# Altium PCB vcu.PcbDoc
Units mm, origin at the board's own origin, x right, y up, seen from the top; angles counter-clockwise.
Board outline 76.29 x 82.55 mm, 2 copper layers (Top Layer, Bottom Layer); 99 components, 80 nets, 385 pads, 70 vias.
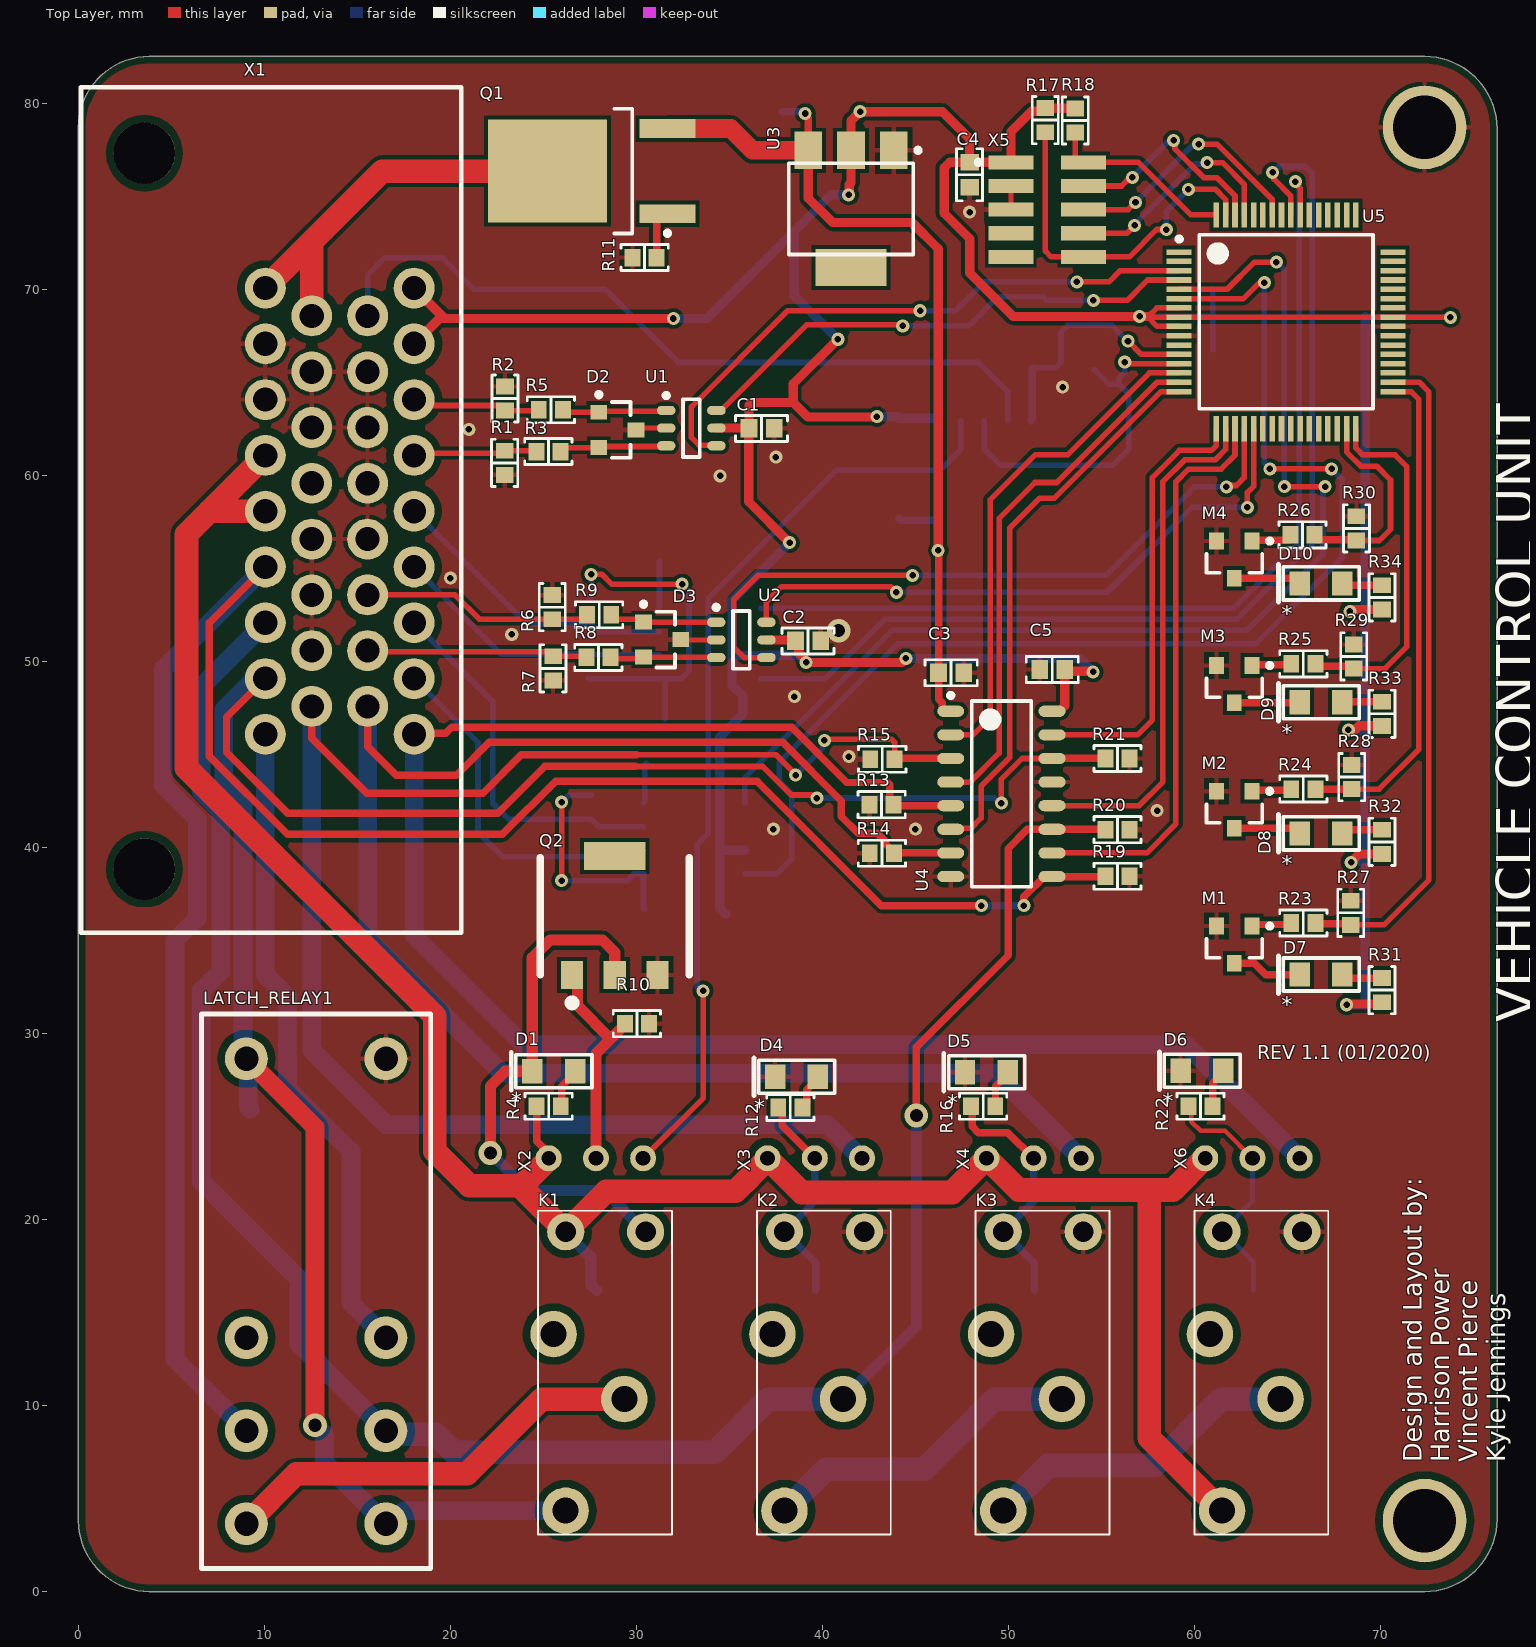
[diagram p0: Top Layer view]
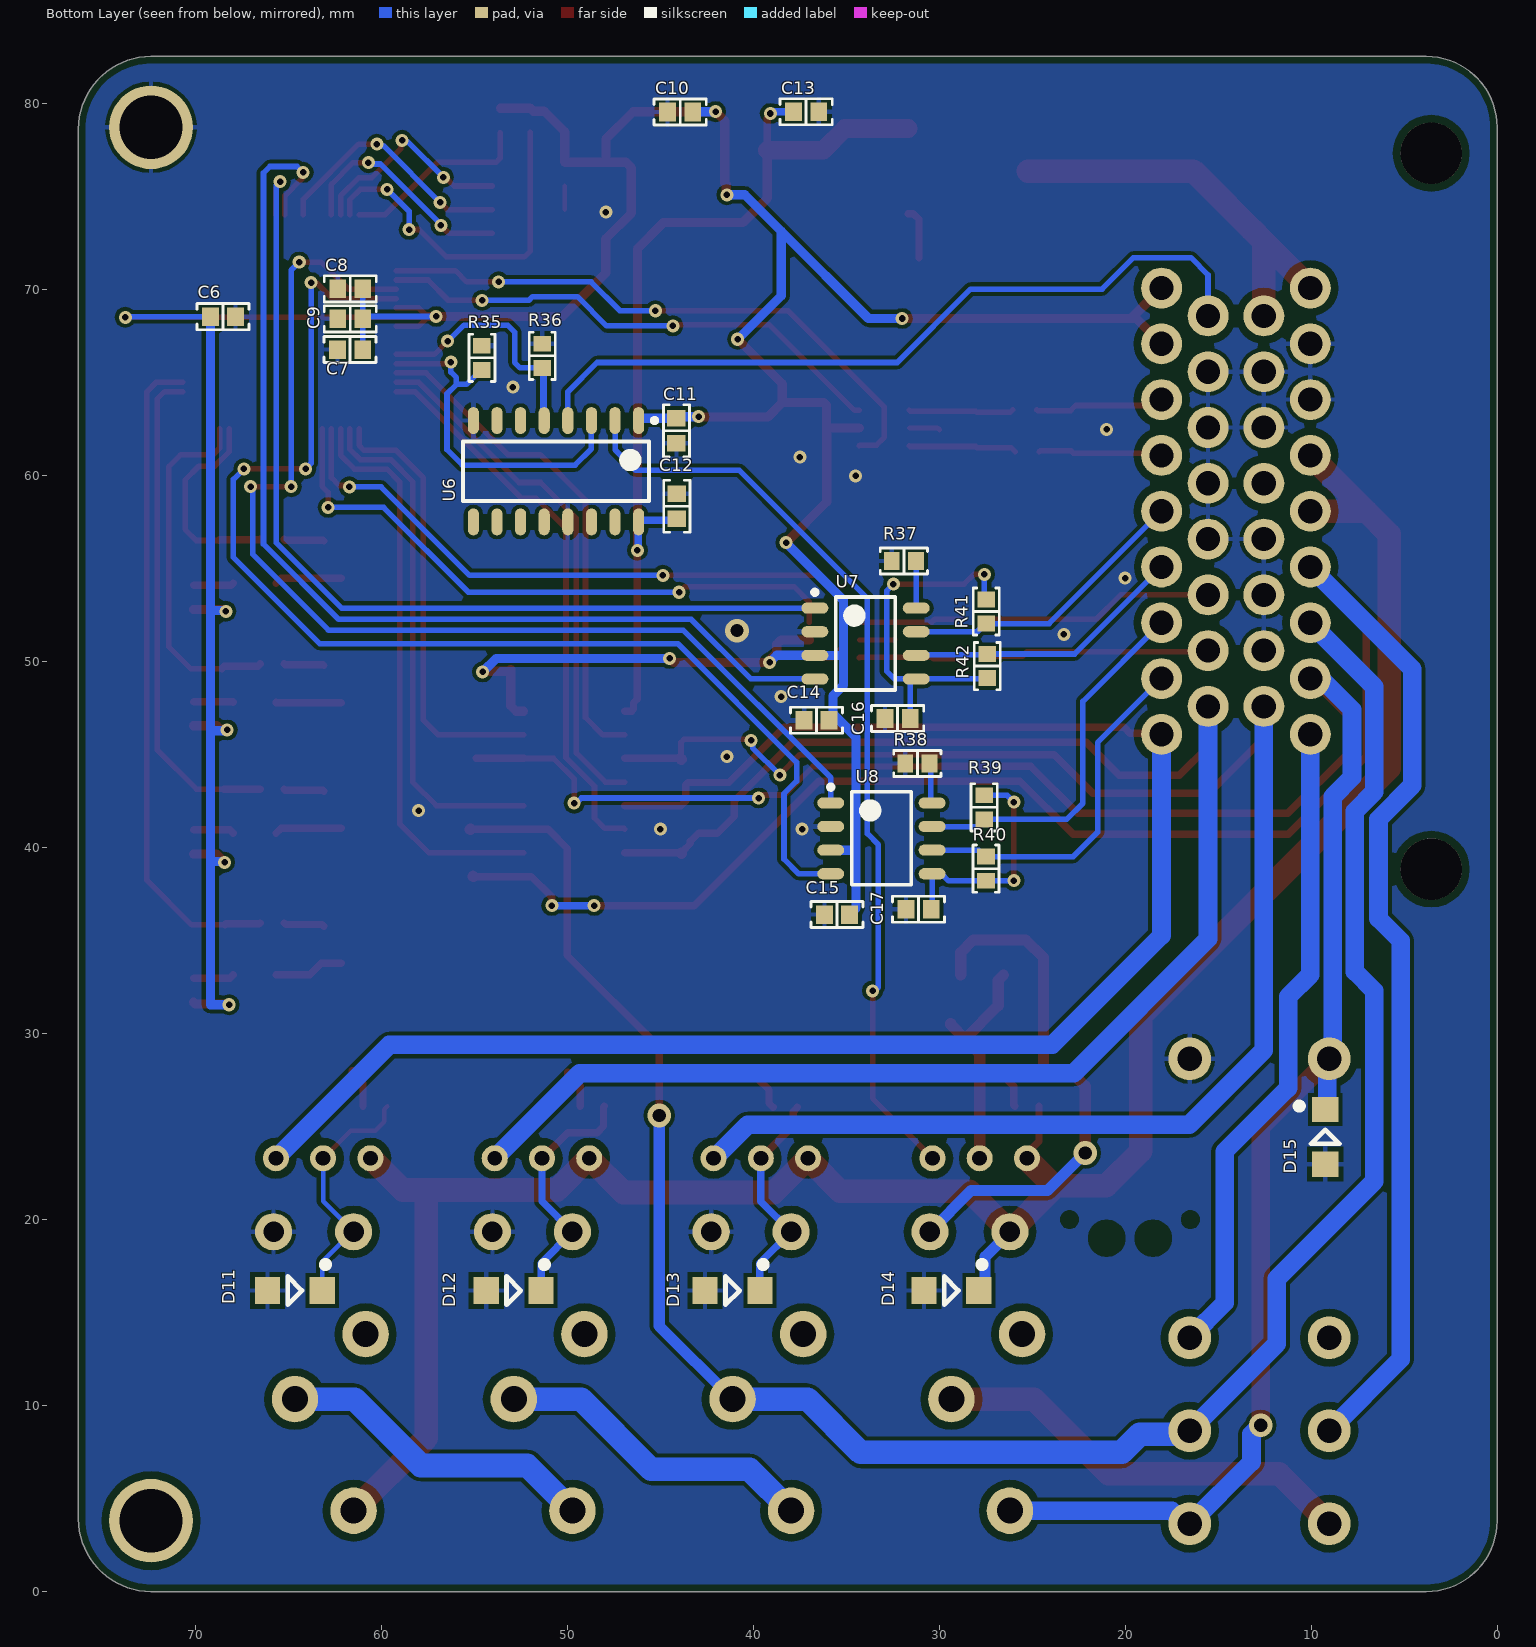
[diagram p1: Bottom Layer view, seen from below]
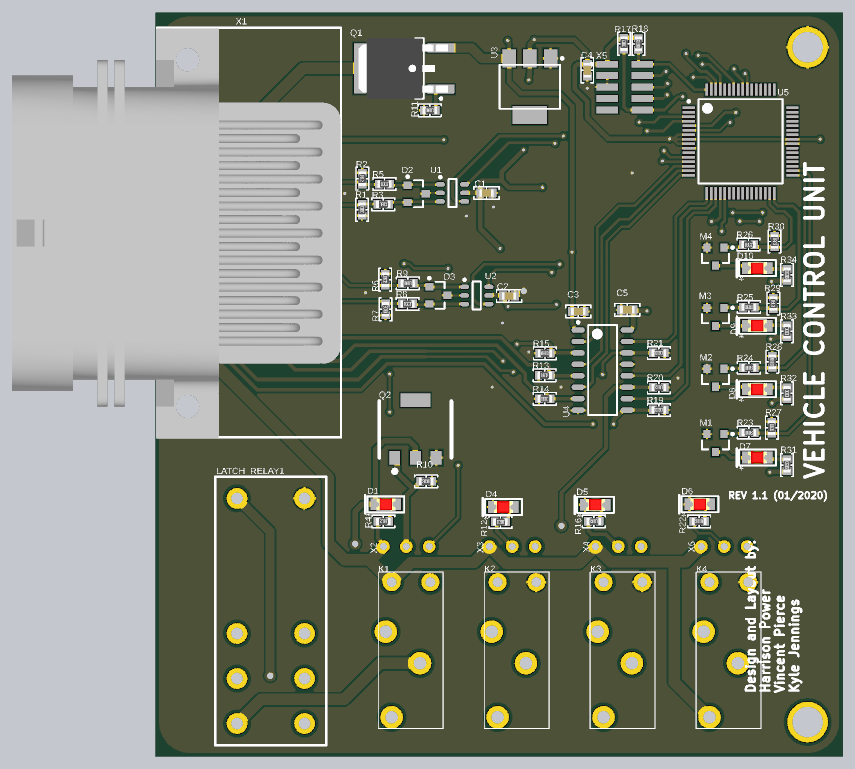
[diagram p2: 3D render of the assembled board from above, using the file's embedded part models]
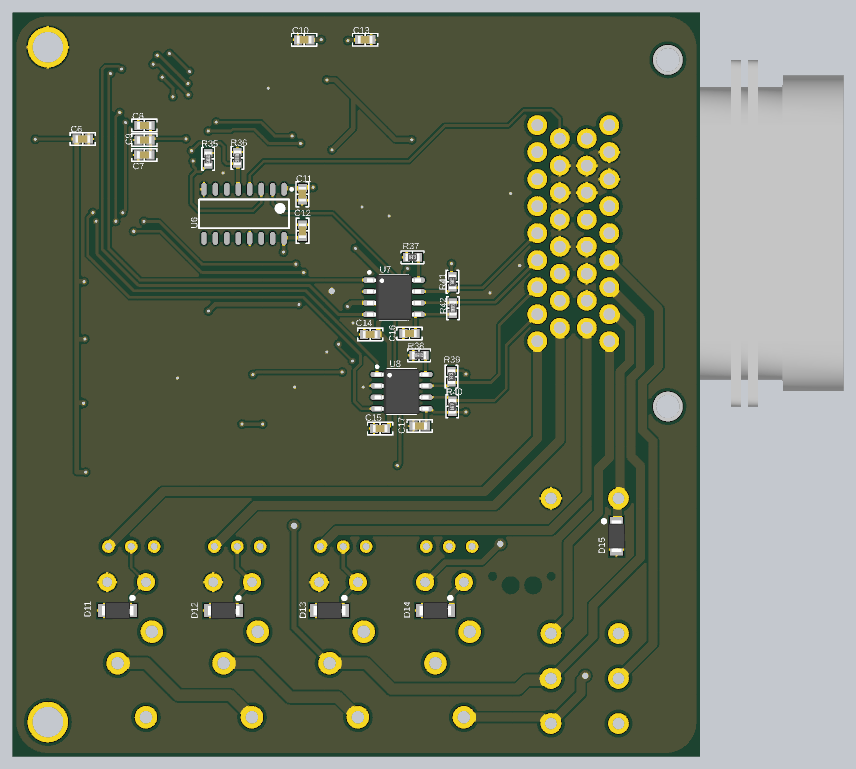
[diagram p3: 3D render of the assembled board from below, using the file's embedded part models]

## Layer stack, top to bottom
Top Solder: solder mask 0.0102, Solder Resist, Dk 3.5
Top Layer: signal copper 0.0356
Dielectric 1: dielectric 0.32, FR-4, Dk 4.8
Bottom Layer: signal copper 0.0356
Bottom Solder: solder mask 0.0102, Solder Resist, Dk 3.5

## Board outline
3.81,0 72.39,0 ccw(c72.39,3.901) 76.291,3.901 76.291,78.649 ccw(c72.39,78.649) 72.39,82.55 3.81,82.55 ccw(c3.81,78.74) 0,78.74 0,3.81 ccw(c3.81,3.81)

## Design rules (kind name [scope] priority, off if disabled: settings)
BoardOutlineClearance [All] p1: gap=0.254 ignorepadtopadclearanceinfootprint=FALSE except(0: Arc-SplitContinuation Track-SplitContinuation SMDPad-SplitContinuation THPad-SplitContinuation Via-SplitContinuation Fill-SplitContinuation Poly-SplitContinuation Region-SplitContinuation Text-SplitContinuation; 0.381: Arc-OutlineEdge Track-OutlineEdge SMDPad-OutlineEdge THPad-OutlineEdge Via-OutlineEdge Fill-OutlineEdge Poly-OutlineEdge Region-OutlineEdge Text-OutlineEdge)
Clearance [All] p1: gap=0.2 ignorepadtopadclearanceinfootprint=FALSE except(0.4: THPad-Fill THPad-Poly THPad-Region)
Height [All] p1: minheight=0 maxheight=500 prefheight=12.7
HoleSize [All] p1 off: absolutevalues=TRUE maxlimit=4 minlimit=0.025 maxpercent=80.000 minpercent=20.000
MinimumSolderMaskSliver [All] p1 off: minsoldermaskwidth=0.1
PolygonConnect [All] p1: thpad.connectstyle=Relief thpad.reliefconductorwidth=0.254 thpad.reliefentries=4 thpad.polygonreliefangle="90 Angle" thpad.airgapwidth=0.203 smdpad.connectstyle=Relief smdpad.reliefconductorwidth=0.254 smdpad.reliefentries=4 smdpad.polygonreliefangle="90 Angle" smdpad.airgapwidth=0.254 via.connectstyle=Direct via.reliefconductorwidth=0.254 via.reliefentries=4 via.polygonreliefangle="90 Angle" via.airgapwidth=0.254
RoutingVias [All] p1: holewidth=0.381 width=0.762 viastyle="Through Hole" minholewidth=0.254 minwidth=0.508 maxholewidth=2.55 maxwidth=2.55
SMDNeckDown [All] p1: percent=100.000
SilkToSilkClearance [All] p1 off: silktosilkclearance=0.05
SilkToSolderMaskClearance [IsPad] p1 off: minsilkscreentomaskgap=0.254 clearancetoexposedcopper=TRUE
SolderMaskExpansion [All] p1: expansion=0.102
Width [All] p1: maxlimit=1.27 minlimit=0.203 preferedwidth=0.254
25 further rules are at their usual default settings.

## Classes and differential pairs
component class U_levelshift5_12: C7 C12 R35 R36 U6
component class 12to5: C2 C7 R11 R13 R14 R15 R20 R21 U6
component class RVP: Q1 R11
component class MCCAN: C2 C16 R37 R41 R42 U6
component class LDO: C9 U1
component class GENCAN: C15 C17 R38 R39 R40 U8
component class "LED 3": D9 M3 R21 R25 R33
channel class CAN_5V: GEN_CAN MC_CAN
component class Shutdown: D3 D5 D11 D12 D13 D14 D15 K3 K4 LATCH_RELAY1 Q2 R4 R10 R12 R16 X4 X5 X6 Y1 Y2 Y3 Y4
channel class LED: "LED 1" "LED 2" "LED 4"
component class U_MKE1xFxxxVLH: C1 C7 C9 C12 R17 U5 X5
component class WSBuffer: C1 C2 D2 D3 R1 R2 R3 R6 R8 U1 U2
component class Conn: X1
component class "LED 4": D15 M4 R10 R26 R34
component class "LED 2": D8 M2 R15 R20 R32
component class "LED 1": D12 M1 R4 R27 R31

## Components (designator, comment, footprint, x,y, rotation, side; value= is the part's Value field where it differs from the comment)
C1 "capacitor" 0603 36.737,62.548 r180 top (schematic designator C4)
C2 "capacitor" 0603 39.237,51.121 r180 top (schematic designator C3)
C3 "capacitor" 0603 46.928,49.407 r180 top (schematic designator C14)
C4 "capacitor" 0603 47.921,76.188 r90 top (schematic designator C7)
C5 "capacitor" 0603 52.368,49.583 r0 top (schematic designator C15)
C6 "capacitor" 0603 68.519,68.559 r0 bottom (schematic designator C8)
C7 "capacitor" 0603 61.685,66.787 r180 bottom (schematic designator C11)
C8 "capacitor" 0603 61.675,70.054 r180 bottom (schematic designator C9)
C9 "capacitor" 0603 61.673,68.44 r180 bottom (schematic designator C10)
C10 "capacitor" 0603 43.934,79.564 r180 bottom (schematic designator C13)
C11 "capacitor" 0603 44.135,62.421 r90 bottom (schematic designator C5)
C12 "capacitor" 0603 44.112,58.362 r270 bottom (schematic designator C6)
C13 "capacitor" 0603 37.161,79.575 r0 bottom (schematic designator C12)
C14 "capacitor" 0603 36.6,46.85 r180 bottom (schematic designator C1)
C15 "capacitor" 0603 35.5,36.404 r180 bottom (schematic designator C1)
C16 "capacitor" 0603 32.24,46.947 r0 bottom (schematic designator C2)
C17 "capacitor" 0603 31.112,36.687 r0 bottom (schematic designator C2)
D1 "LED" 0805_LED 25.554,27.982 r180 top (schematic designator D11)
D2 "AZ23C4V7-7-F Dual Zenner Diodes" SOT23-3 28.984,62.465 r0 top
D3 "AZ23C4V7-7-F Dual Zenner Diodes" SOT23-3 31.385,51.196 r0 top (schematic designator D1)
D4 "LED" 0805_LED 38.611,27.682 r180 top (schematic designator D9)
D5 "LED" 0805_LED 48.825,27.929 r180 top (schematic designator D6)
D6 "LED" 0805_LED 60.421,28.006 r180 top (schematic designator D4)
D7 "LED" 0805_LED 66.818,33.179 r180 top (schematic designator D3)
D8 "LED" 0805_LED 66.818,40.769 r180 top (schematic designator D3)
D9 "LED" 0805_LED 66.818,47.82 r180 top (schematic designator D3)
D10 "LED" 0805_LED 66.818,54.215 r180 top (schematic designator D3)
D11 "" SOD123F 64.657,16.187 r180 bottom (schematic designator D5)
D12 "" SOD123F 52.888,16.187 r180 bottom (schematic designator D7)
D13 "" SOD123F 41.12,16.187 r180 bottom (schematic designator D8)
D14 "" SOD123F 29.351,16.187 r180 bottom (schematic designator D12)
D15 "" SOD123F 9.244,24.455 r90 bottom (schematic designator D10)
K1 "ACTP112" ACTP112 30.011,4.345 r90 top (schematic designator K4)
K2 "ACTP112" ACTP112 41.776,4.345 r90 top (schematic designator K3)
K3 "ACTP112" ACTP112 53.542,4.345 r90 top (schematic designator K2)
K4 "ACTP112" ACTP112 65.307,4.345 r90 top (schematic designator K1)
LATCH_RELAY1 "JW2SN-DC12V-Relay" JW2SN-DC12V-Relay 12.781,16.093 r90 top
M1 "" SOT23-3 62.156,34.788 r270 top
M2 "" SOT23-3 62.156,42.041 r270 top (schematic designator M1)
M3 "" SOT23-3 62.156,48.799 r270 top (schematic designator M1)
M4 "" SOT23-3 62.156,55.494 r270 top (schematic designator M1)
Q1 "DMP3010LK3-13" DMP3010LK3-13 27.573,76.385 r180 top
Q2 "STN3NF06L" STN3NF06L 26.543,33.155 r0 top
R1 "10k" "RES 0603/1608" 22.918,60.695 r90 top (schematic designator R10)
R2 "10k" "RES 0603/1608" 22.94,64.155 r270 top (schematic designator R11)
R3 "1k" "RES 0603/1608" 25.274,61.3 r0 top (schematic designator R9)
R4 "2.4k" "RES 0603/1608" 25.287,26.093 r180 top (schematic designator R23)
R5 "1k" "RES 0603/1608" 25.406,63.549 r0 top (schematic designator R8)
R6 "10k" "RES 0603/1608" 25.481,52.936 r270 top (schematic designator R7)
R7 "10k" "RES 0603/1608" 25.524,49.643 r90 top (schematic designator R6)
R8 "1k" "RES 0603/1608" 27.963,50.235 r0 top (schematic designator R5)
R9 "1k" "RES 0603/1608" 28,52.525 r0 top (schematic designator R4)
R10 "10k" "RES 0603/1608" 30.032,30.539 r180 top (schematic designator R30)
R11 "10k" "RES 0603/1608" 30.442,71.734 r0 top (schematic designator R19)
R12 "2.4k" "RES 0603/1608" 38.282,26.032 r180 top (schematic designator R22)
R13 "4.7k" "RES 0603/1608" 43.186,42.316 r0 top (schematic designator R25)
R14 "4.7k" "RES 0603/1608" 43.205,39.702 r0 top (schematic designator R26)
R15 "4.7k" "RES 0603/1608" 43.225,44.756 r0 top (schematic designator R24)
R16 "2.4k" "RES 0603/1608" 48.655,26.093 r180 top (schematic designator R21)
R17 "10k" "RES 0603/1608" 51.993,79.13 r90 top (schematic designator R18)
R18 "10k" "RES 0603/1608" 53.6,79.108 r90 top (schematic designator R17)
R19 "4.7k" "RES 0603/1608" 55.877,38.467 r180 top (schematic designator R27)
R20 "4.7k" "RES 0603/1608" 55.877,40.971 r180 top (schematic designator R28)
R21 "4.7k" "RES 0603/1608" 55.877,44.799 r180 top (schematic designator R29)
R22 "2.4k" "RES 0603/1608" 60.339,26.093 r180 top (schematic designator R20)
R23 "" "RES 0603/1608" 65.865,35.952 r0 top (schematic designator R13)
R24 "" "RES 0603/1608" 65.865,43.15 r0 top (schematic designator R13)
R25 "" "RES 0603/1608" 65.865,49.886 r0 top (schematic designator R13)
R26 "" "RES 0603/1608" 65.825,56.825 r0 top (schematic designator R13)
R27 "" "RES 0603/1608" 68.419,36.5 r270 top (schematic designator R14)
R28 "" "RES 0603/1608" 68.47,43.8 r270 top (schematic designator R14)
R29 "" "RES 0603/1608" 68.578,50.285 r270 top (schematic designator R14)
R30 "" "RES 0603/1608" 68.723,57.17 r270 top (schematic designator R14)
R31 "" "RES 0603/1608" 70.102,32.341 r270 top (schematic designator R12)
R32 "" "RES 0603/1608" 70.102,40.314 r270 top (schematic designator R12)
R33 "" "RES 0603/1608" 70.102,47.201 r270 top (schematic designator R12)
R34 "" "RES 0603/1608" 70.102,53.462 r270 top (schematic designator R12)
R35 "1" "RES 0603/1608" 54.596,66.347 r270 bottom (schematic designator R15)
R36 "1" "RES 0603/1608" 51.348,66.451 r270 bottom (schematic designator R16)
R37 "100" "RES 0603/1608" 31.903,55.419 r180 bottom (schematic designator R3)
R38 "100" "RES 0603/1608" 31.178,44.533 r180 bottom (schematic designator R3)
R39 "62" "RES 0603/1608" 27.587,42.171 r90 bottom (schematic designator R2)
R40 "62" "RES 0603/1608" 27.488,38.869 r90 bottom (schematic designator R1)
R41 "62" "RES 0603/1608" 27.473,52.702 r90 bottom (schematic designator R2)
R42 "62" "RES 0603/1608" 27.418,49.769 r90 bottom (schematic designator R1)
U1 "74LVC2G17GW" TSOP95P280X110-6N 32.957,62.565 r0 top (schematic designator U3)
U2 "74LVC2G17GW" TSOP95P280X110-6N 35.646,51.175 r0 top
U3 "NCP1117ST50T3G" SOT-223-3 41.543,74.353 r270 top (schematic designator U6)
U4 "CD4504BM96" SOIC-16 49.63,42.894 r0 top (schematic designator U7)
U5 "MKE18F512VLH16" TQFP64 64.943,68.281 r0 top
U6 "CD4504BM96" SOIC-16 50.611,60.246 r270 bottom (schematic designator U4)
U7 "MCP2561 CAN Transceiver" SOIC-8 33.965,50.98 r180 bottom (schematic designator U1)
U8 "MCP2561 CAN Transceiver" SOIC-8 33.112,40.503 r180 bottom (schematic designator U1)
X1 "CONN Superseal 34POS" "Superseal 34POS" 18.047,70.097 r270 top
X2 "XG8V-0331" XG8V-0331 30.367,23.299 r180 top (schematic designator X6)
X3 "XG8V-0331" XG8V-0331 42.136,23.299 r180 top (schematic designator X5)
X4 "XG8V-0331" XG8V-0331 53.904,23.299 r180 top
X5 "CN-2P-M-R10" HDR2X5_SMT 52.096,74.315 r270 top (schematic designator X2)
X6 "XG8V-0331" XG8V-0331 65.673,23.299 r180 top (schematic designator X3)

## Footprints (in the part's own frame and the unit in brackets; to place one, negate y for a bottom-side part, rotate by r counter-clockwise, add the part's x,y. Pads: shape width x height; smd on the part's side, far side on the other; paste and mask are expansions set on the pad)
0603 [mm]
  rect 0.9x1 smd: 1(-0.675,0) 2(0.675,0)
  silkscreen extent -1.4,-0.7 1.4,0.7, body extent -0.8,-0.41 0.8,0.41, height 0.82
0805_LED [mm]
  rect 1.1x1.3 smd: 1(-1.15,0) 2(1.15,0)
  silkscreen extent -2.06,-1.02 2.29,1.02, body extent -1.05,-0.67 1.05,0.68, height 0.9
ACTP112 [mm] "ACTP112, 12V Relay"
  round 2 hole 1.1: COIL1(15,3.81) COIL2(15,-0.49)
  round 2.5 hole 1.4: COM(0,3.81) NC(9.5,4.46) NO(6,0.66)
  silkscreen extent -1.27,-1.91 16.13,5.3, body extent -1.27,-1.91 16.13,5.33, height 13.5
DMP3010LK3-13 [mm] "D-PAK, 3-Pads, Body 6.20x6.71mm (max), IPC Medium Density"
  rect 3x1 smd: 1(-4.1,2.29) 2(-4.1,-2.29)
  rect 6.4x5.55 smd: 3(2.35,0)
  silkscreen extent -4.23,-3.35 -1.25,3.46, body extent -4.86,-3.35 5.04,3.35, height 2.39
HDR2X5_SMT [mm] "Header, 10-Leads, Body 3.43x6.35mm, Pitch 1.27mm"
  rect 0.76x2.4 smd: 1(-2.54,-1.95) 2(-2.54,1.95) 3(-1.27,-1.95) 4(-1.27,1.95) 5(0,-1.95) 6(0,1.95) 7(1.27,-1.95) 8(1.27,1.95) 9(2.54,-1.95) 10(2.54,1.95)
  silkscreen extent -2.66,-3.82 -2.42,-3.57, body extent -3.17,-1.72 3.18,1.72, height 4.55
JW2SN-DC12V-Relay [mm] "JW2SN-DC12V"
  round 2.3 hole 1.3: 1(12.554,-3.75) 2(-2.446,-3.75) 3(-7.446,-3.75) 4(-12.446,-3.75) 5(-12.446,3.75) 6(-7.446,3.75) 7(-2.446,3.75) 8(12.554,3.75)
  silkscreen extent -14.86,-6.16 14.97,6.16, body extent -14.73,-6.1 14.86,6.1, height 20
"RES 0603/1608" [mm] "Chip Resistor, 2-Leads, Body 1.60x0.80mm, IPC Medium Density"
  rect 0.85x0.95 smd: 1(-0.65,0) 2(0.65,0)
  silkscreen extent -1.27,-0.7 1.27,0.7, body extent -0.8,-0.4 0.8,0.4, height 0.45
SOD123F [mm] "SODFL, 2-Leads, Body 1.80x3.50mm, IPC Low Density"
  rect 1.35x1.45 smd: 1(-1.475,0) 2(1.475,0)
  silkscreen extent -0.38,-0.76 1.75,1.5, body extent -1.75,-0.95 1.75,0.95, height 1.15
SOIC-8 [mm] "SOIC, 8-Leads, Body 4.90x3.90mm, Pitch 1.27mm, IPC Medium Density"
  oval 1.45x0.6 smd: 1(-2.725,1.905) 2(-2.725,0.635) 3(-2.725,-0.635) 4(-2.725,-1.905) 5(2.725,-1.905) 6(2.725,-0.635) 7(2.725,0.635) 8(2.725,1.905)
  silkscreen extent -2.85,-2.5 1.6,2.88, body extent -3,-2.5 3,2.5, height 1.75
SOIC-16 [mm]
  oval 1.45x0.6 smd: 1(-2.725,4.445) 2(-2.725,3.175) 3(-2.725,1.905) 4(-2.725,0.635) 5(-2.725,-0.635) 6(-2.725,-1.905) 7(-2.725,-3.175) 8(-2.725,-4.445) 9(2.725,-4.445) 10(2.725,-3.175) 11(2.725,-1.905) 12(2.725,-0.635) 13(2.725,0.635) 14(2.725,1.905) 15(2.725,3.175) 16(2.725,4.445)
  silkscreen extent -2.85,-5 1.6,5.42, body extent -2,-5 2,5, height 1.75
SOT23-3 [mm] "SOT23, 3-Leads, Body 2.92x2.37mm, Pitch 0.95mm, IPC Medium Density, NUP2105L"
  rect 0.9x0.8 smd: 1(-1,0.95) 2(-1,-0.95) 3(1,0)
  silkscreen extent -1.12,-1.5 0.7,2.02, body extent -0.7,-1.52 0.7,1.52, height 1.11
SOT-223-3 [mm] "SOT223127P600-8N, NCP1117STAT3G, MMBT4403-7-F"
  rect 2x1.5 smd: 1(-3.15,2.3) 2(-3.15,0) 3(-3.15,-2.3)
  rect 2x3.8 smd: THM(3.15,0)
  silkscreen extent -3.27,-3.35 2.45,3.73, body extent -1.85,-3.35 1.85,3.35, height 1.8
STN3NF06L [mm] "N-channel Power MOSFET"
  rect 1.2x1.5 smd: 1(0,0) 2(2.3,0) 3(4.6,0)
  rect 3.3x1.5 smd: 4(2.3,6.4)
  silkscreen extent -1.7,-1.7 6.3,6.3
"Superseal 34POS" [mm]
  round 2.2 hole 1.3: A1(0,0) A2(3,0) A3(6,0) A4(9,0) A5(12,0) A6(15,0) A7(18,0) A8(21,0) A9(24,0) A10(1.5,-2.5) A11(4.5,-2.5) A12(7.5,-2.5) A13(10.5,-2.5) A14(13.5,-2.5) A15(16.5,-2.5) A16(19.5,-2.5) A17(22.5,-2.5) A18(1.5,-5.5) A19(4.5,-5.5) A20(7.5,-5.5) A21(10.5,-5.5) A22(13.5,-5.5) A23(16.5,-5.5) A24(19.5,-5.5) A25(22.5,-5.5) A26(0,-8) A27(3,-8) A28(6,-8) A29(9,-8) A30(12,-8) A31(15,-8) A32(18,-8) A33(21,-8) A34(24,-8)
  round 3.3 hole 3.3 unplated: MH(-7.25,-14.5) MH(31.25,-14.5)
  silkscreen extent -10.79,-17.91 34.67,2.54, body extent -10.75,-34 34.75,2.5, height 28.16
TQFP64 [mm] "TSQFP, 64-Leads, Body 10.00x10.00mm, Pitch 0.50mm, IPC Medium Density, MKE18F512VLH16"
  rect 1.35x0.3 smd: 1(-5.75,3.75) 2(-5.75,3.25) 3(-5.75,2.75) 4(-5.75,2.25) 5(-5.75,1.75) 6(-5.75,1.25) 7(-5.75,0.75) 8(-5.75,0.25) 9(-5.75,-0.25) 10(-5.75,-0.75) 11(-5.75,-1.25) 12(-5.75,-1.75) 13(-5.75,-2.25) 14(-5.75,-2.75) 15(-5.75,-3.25) 16(-5.75,-3.75) 33(5.75,-3.75) 34(5.75,-3.25) 35(5.75,-2.75) 36(5.75,-2.25) 37(5.75,-1.75) 38(5.75,-1.25) 39(5.75,-0.75) 40(5.75,-0.25) 41(5.75,0.25) 42(5.75,0.75) 43(5.75,1.25) 44(5.75,1.75) 45(5.75,2.25) 46(5.75,2.75) 47(5.75,3.25) 48(5.75,3.75)
  rect 0.3x1.35 smd: 17(-3.75,-5.75) 18(-3.25,-5.75) 19(-2.75,-5.75) 20(-2.25,-5.75) 21(-1.75,-5.75) 22(-1.25,-5.75) 23(-0.75,-5.75) 24(-0.25,-5.75) 25(0.25,-5.75) 26(0.75,-5.75) 27(1.25,-5.75) 28(1.75,-5.75) 29(2.25,-5.75) 30(2.75,-5.75) 31(3.25,-5.75) 32(3.75,-5.75) 49(3.75,5.75) 50(3.25,5.75) 51(2.75,5.75) 52(2.25,5.75) 53(1.75,5.75) 54(1.25,5.75) 55(0.75,5.75) 56(0.25,5.75) 57(-0.25,5.75) 58(-0.75,5.75) 59(-1.25,5.75) 60(-1.75,5.75) 61(-2.25,5.75) 62(-2.75,5.75) 63(-3.25,5.75) 64(-3.75,5.75)
  silkscreen extent -5.87,-4.67 4.67,4.68, body extent -5,-5 5,5, height 1.6
TSOP95P280X110-6N [mm] "TSOP, 6-Leads, Body 2.90x1.50mm, Pitch 0.95mm, IPC Medium Density"
  oval 1x0.5 smd: 1(-1.35,0.95) 2(-1.35,0) 3(-1.35,-0.95) 4(1.35,-0.95) 5(1.35,0) 6(1.35,0.95)
  silkscreen extent -1.47,-1.55 0.45,1.87, body extent -0.85,-1.55 0.85,1.55, height 1.1
XG8V-0331 [mm] "3 pin header"
  round 1.4 hole 0.8: 1(0,0) 2(2.54,0) 3(5.08,0)

## Part data
C1 C2: library part 1, "Generic 0603 capacitor", capacitance=.1uF, Dielectric=Ceramic, package=0603, percent tolerance=10, voltage=50, ESR=1, id=1, name="0603 Capacitor", quantity=0
C3 C5 C11 C12: library part 1, "Generic 0603 capacitor", capacitance=0.1uF, id=1
C4 C6 C7 C8 C9 C14 C15: library part 1, "Generic 0603 capacitor", capacitance=0.1uF, Dielectric=Ceramic, package=0603, percent tolerance=10, voltage=50, ESR=1, id=1, name="0603 Capacitor", quantity=0
C10 C13: library part 1, "Generic 0603 capacitor", capacitance=10uF, Dielectric=Ceramic, package=0603, percent tolerance=10, voltage=50, ESR=1, id=1, name="0603 Capacitor", quantity=0
C16 C17: library part 1, "Generic 0603 capacitor", capacitance=4700pF, Dielectric=Ceramic, package=0603, percent tolerance=10, voltage=50, ESR=1, id=1, name="0603 Capacitor", quantity=0
D1 D4 D5 D6 D7 D8 D9 D10: library part 19, "Generic 0805 LED", package=0805, id=19, name="0805 LED", numcircuits=1, quantity=0, vr=1
D2 D3: library part 14, "DIODE ZENER ARRAY 4.7V SOT23-3", package=SOT23-3, id=14, link=https://www.digikey.com/product-detail/en/diodes-incorporated/AZ23C4V7-7-F/AZ23C4V7-FDICT-ND/815309, name=AZ23C4V7-7-F, quantity=0
D11 D12 D13 D14 D15: library part 2, "Diode Super Barrier 40V 1A Surface Mount SOD-", package=SOD-123, id=2, link=https://www.digikey.com/product-detail/en/diodes-incorporated/1N5819HW1-7-F/1N5819HW1-7-FDITR-ND/5768523, name=1N5819, quantity=0
K1 K2 K3 K4: library part 1, current=0, voltage=12, createdby=Kevin, id=1, LatestRevisionDate=17-Jul-2002, LatestRevisionNote="Re-released for DXP Platform.", link=https://www.digikey.com/product-detail/en/panasonic-electric-works/ACTP112/255-5163-ND/4691838, name=ACTP112, PackageReference=MODULE5B, Published=8-Jun-2000, Publisher="Altium Limited", quantity=0
LATCH_RELAY1: library part 2, Manufacturer_id=1, Drawer_id=1, idRelay=2, name="Relay JW2SN-DC12"
M1 M2 M3 M4: library part 6, "MOSFET N-CHANNEL 30V 5A SOT23", current=2.8A, package=SOT-23, id=6, link=https://www.digikey.com/product-detail/en/diodes-incorporated/DMG2302UK-7/DMG2302UK-7DICT-ND/6010163, name=DMG2302UK-7, numcircuits=1, quantity=0, rdson=90mOhm, Type=N_Channel, vdsmax=0, vgsmax=1, vt=800
Q1: library part 26, "P-Channel MOSFET 30V 17A TO252", current=17A, Manufacturer_id=1, package=TO-252-3, createdby=Kevin, Drawer_id=1, id=26, idFuse=3, link=https://www.digikey.com/product-detail/en/diodes-incorporated/DMP3010LK3-13/DMP3010LK3-13DICT-ND/3076574, name=DMP3010LK3-13, numcircuits=1, quantity=0, rdson=8mOhm, Type=P_Channel, vdsmax=30, vgsmax=20
Q2: library part 8, "MOSFET N-CH 60V 4A SOT223", current=4A, package=SOT-233, id=8, link=https://www.digikey.com/product-detail/en/stmicroelectronics/STN3NF06L/497-3177-1-ND/654516, name=STN3NF06L, numcircuits=1, quantity=0, rdson=70m, Type=N_Channel, vdsmax=0, vgsmax=0
R1 R2 R3 R4 R5 R6 R7 R8 R9 R10 R11 R12 R13 R14 R15 R16 R17 R18 R19 R20 R21 R22 R37 R38 R39 R40 R41 R42: library part 1, package=0603, percent tolerance=5, id=1, name="0603 Resistor", quantity=0
  R1 R2 R6 R7 R10 R11 R17 R18: resistance=10k
  R3 R5 R8 R9: resistance=1k
  R4 R12 R16 R22: resistance=2.4k
  R13 R14 R15 R19 R20 R21: resistance=4.7k
  R37 R38: resistance=100
  R39 R40 R41 R42: resistance=62
R23 R24 R25 R26 R31 R32 R33 R34: library part 1, package=0603, percent tolerance=5, resistance=1k, id=1, name="0603 Resistor", quantity=0
R27 R28 R29 R30: library part 1, package=0603, percent tolerance=5, resistance=100k, id=1, name="0603 Resistor", quantity=0
R35 R36: package=0603, percent tolerance=5, id=1, name="0603 Resistor", quantity=0, resistance=1
U1 U2: library part 17, "Buffer, Non-Inverting 2 Element 1 Bit per Element Push-Pull Output 6-TSSOP", package=SOT457, createdby=Nolan, createddate="10/16/2019 10:08:58 PM", id=17, name=74LVC2G17, quantity=0, Type=buffer, updatedby=Nolan, updateddate="10/16/2019 10:08:58 PM", vcc=5
U3: library part 16, "5V linear regulator", package=SOT-223-3, id=16, imax=1, link=https://www.digikey.com/product-detail/en/on-semiconductor/NCP1117ST50T3G/NCP1117ST50T3GOSCT-ND/1967217, name=NCP1117ST50T3G, quantity=0
U4 U6: library part 1, "Voltage Level Translator Unidirectional 1 Cir", package=SOIC-16, id=1, link=https://www.digikey.com/product-detail/en/texas-instruments/CD4504BM96/296-14150-2-ND/525968, name=CD4504BM96, quantity=0, Type="Level shifter CMOS-CMOS", vcc=20
U5: library part 1, "32b NXP Microcontroller", package=TQFP64, voltagemax=5.5, voltagemin=2.70000004768372, id=1, name=MKE18F512VLH16, quantity=0
U7 U8: library part 5, package=SOIC-8, id=5, link=https://www.digikey.com/product-detail/en/microchip-technology/MCP2561T-E-SN/MCP2561T-E-SNCT-ND/5148846, name=null, quantity=0, Type=CAN, vcc=0
X1: library part 11, "AMP Superseal 34 POS", id=11, link=https://www.digikey.com/products/en?mpart=6437288-1&&csp=WT.z_cid%3Dsp_8004_20120425_buynow%26TE_cid%3D8004-1541898693362, name=6437288-1, numcontacts=34, numrows=4, Pitch=3mm, quantity=0
X2 X3 X4 X6: library part 8, "XG8V-0331_3pin_header", id=8, link=https://www.digikey.com/products/en/connectors-interconnects/rectangular-connectors-headers-male-pins/314?k=jumper&k=&pkeyword=jumper&pv88=5&sf=0&FV=ffe0013a&quantity=&ColumnSort=0&page=1&pageSize=25, numcontacts=3, Pitch="2.54 mm", quantity=0
X5: library part 4, "CONN_TE_2X5POS", id=4, link=https://www.digikey.com/product-detail/en/5103309-1/A33160-ND/1114898?utm_campaign=buynow&WT.z_cid=ref_octopart_dkc_buynow&utm_medium=aggregator&curr=usd&site=us&utm_source=octopart, name=5103309-1, numcontacts=10, numrows=2, Pitch=2.54mm, quantity=0

## Free pads (board coordinates)
  round 4.5 hole 3.4: 2(72.39,3.81) 2(72.39,78.74)

## Via types
v1: diameter 0.7, hole 0.35, Top Layer to Bottom Layer, tented both sides, 66 vias
v2: diameter 1.27, hole 0.711, Top Layer to Bottom Layer, tented both sides, 4 vias

## Nets (pads, with @x,y where several pads share a name; then routed paths per layer and width w, separated by ;. In a path a pad name is that pad's centre, name@x,y a point inside that pad or via, vN(x,y) a via of type N, cw(c..) or ccw(c..) an arc to the next point about the centre after c; other vN are vias at no path point)
5V: C1.2 C2.2 C4.2 C5.2 C6.2 C7.2 C8.2 C9.2 C10.2 C11.2 C14.2 C15.2 R17.2 R18.2 R31.2 R32.2 R33.2 R34.2 U1.5 U2.5 U3.2 U4.16 U5.7 U5.8 U5.9 U5.41 U6.1 U7.3 U8.3 X1.A1 X1.A2 X5.1 | length 231.5
  Top Layer w0.3: v1@57.052,68.568 v1(57.061,68.568) ; U5.9 58.006,68.031 57.506,68.531 ; U5.7 57.993,69.031 57.529,68.568 57.47,68.568 57.506,68.531 ; v1(73.775,68.525) 73.769,68.531 U5.41 U5.8 57.506,68.531
  Top Layer w0.5: X1.A2 19.409,68.459 19.685,68.459 ; X1.A1 19.685,68.459 ; v1(31.992,68.459) 19.685,68.459 ; U1.5 C1.2@36.045,62.565 ; U2.5 38.508,51.175 C2.2 38.738,50.945 38.738,50.474 39.129,50.082 v1(39.129,49.961) 44.284,49.961 v1(44.501,50.178) ; v1(38.241,56.404) 36.045,58.6 C1.2@36.045,62.565 ; v1(40.84,67.343) 38.44,64.943 38.44,63.937 ; v1(41.417,75.11) 41.455,75.148 41.455,75.665 41.543,75.753 U3.2 41.543,79.096 v1(42.032,79.585) 46.46,79.585 47.921,78.123 C4.2 ; v1(42.94,63.183) 42.92,63.163 39.214,63.163 38.44,63.937 ; U4.16 52.753,47.339 53.043,47.629 C5.2 53.138,49.488 54.522,49.488 v1(54.561,49.449) ; R18.2 53.589,79.769 52.004,79.769 R17.2 51.818,79.605 51.25,79.605 50.146,78.5 X5.1 50.142,76.859 47.925,76.859 C4.2 ; v1@57.052,68.568 50.274,68.568 47.934,70.908 47.934,72.746 46.557,74.123 46.557,76.57 46.849,76.863 C4.2 ; v1(57.061,68.568) 57.47,68.568 ; v1(68.195,31.555) 68.234,31.593 70.004,31.593 R31.2 ; v1(68.291,46.334) 68.33,46.372 68.68,46.372 68.859,46.551 R33.2 ; v1(68.366,52.714) 68.464,52.812 R34.2 ; v1(68.436,39.216) 68.877,39.657 70.095,39.657 R32.2 ; C1.2@36.045,62.565 C1.2 36.062,63.788 36.21,63.937 38.44,63.937
  Bottom Layer w0.3: v1(57.061,68.568) 60.87,68.568 C9.2 ; C8.2 60.998,70.052 C9.2 ; C7.2 60.998,66.799 C9.2 ; C6.2 73.741,68.559 v1(73.775,68.525)
  Bottom Layer w0.5: v1(31.992,68.459) 33.804,68.459 38.497,73.152 ; 34.535,39.865 34.824,39.865 34.827,39.868 U8.3 ; C15.2 34.48,36.749 34.48,45.955 35.717,47.192 35.717,48.172 35.15,48.738 35.15,50.32 ; v1(38.241,56.404) 35.15,53.313 35.15,50.32 ; v1(39.129,49.961) 38.746,50.345 U7.3 36.682,50.337 35.167,50.337 35.15,50.32 ; v1(40.84,67.343) 38.497,69.686 38.497,73.152 ; v1(41.417,75.11) 40.455,75.11 38.497,73.152 ; v1(42.032,79.585) 43.239,79.585 C10.2 ; v1(42.94,63.183) 44.047,63.183 C11.2 46.041,63.096 U6.1 ; v1(44.501,50.178) 53.832,50.178 v1(54.561,49.449) ; v1(68.195,31.555) 69.194,31.555 69.194,39.318 ; v1(68.291,46.334) 68.33,46.295 69.19,46.295 69.194,46.292 ; v1(68.366,52.714) 68.404,52.752 69.156,52.752 69.194,52.79 ; v1(68.436,39.216) 68.474,39.254 69.129,39.254 69.194,39.318 ; C6.2 69.194,52.79 ; 69.194,39.318 69.194,46.292 ; 69.194,46.292 69.194,52.79
12V: C3.2 C12.2 C13.2 Q1.2 U3.3 U4.1 U6.16 | length 51.1
  Top Layer w0.4: v1(39.083,79.483) 39.083,79.402 39.243,79.242 U3.3 ; v1(46.231,55.992) 46.253,55.97 C3.2 46.253,47.991 46.442,47.802 46.442,47.432 46.534,47.339 U4.1
  Top Layer w0.5: U3.3 39.243,74.933 40.558,73.617 44.828,73.617 46.231,72.214 v1(46.231,55.992)
  Top Layer w1: Q1.2 35.074,78.675 36.246,77.503 U3.3
  Bottom Layer w0.4: C13.2 38.91,79.575 39.002,79.483 v1(39.083,79.483) ; C12.2 44.196,57.604 46.083,57.604 U6.16 46.198,57.488 46.198,56.025 v1(46.231,55.992)
12VTSR: D14.2 K1.COIL1 K4.COM R4.2 X1.A29 X1.A30 X2.3 X3.3 X4.3 X6.3 | length 123.6
  Top Layer w0.4: R4.2 24.637,24.22 25.287,23.57 X2.3
  Top Layer w1.27: X1.A30 10.042,58.092 7.042,58.092 ; X1.A29@10.225,60.919 X1.A29 7.042,58.092 ; 23.849,21.697 K1.COIL1 28.381,21.525 35.333,21.525 36.133,22.324 36.133,22.341 37.056,23.264 X3.3 38.898,21.457 46.982,21.457 X4.3 48.86,23.299 50.566,21.593 57.689,21.593 ; X2.3 25.287,23.264 23.849,21.826 21.019,21.826 19.164,23.681 19.164,30.933 5.81,44.287 5.81,56.86 7.042,58.092 ; X6.3 60.558,23.299 58.851,21.593 57.689,21.593 ; K4.COM 57.581,8.261 57.581,21.484 57.689,21.593
  Bottom Layer w0.6: K1.COIL1 27.545,18.002 27.545,16.519 D14.2
BMS_OK: D12.2 K3.COIL1 R16.2 X4.2 | length 13.6
  Top Layer w0.4: R16.2 48.057,26.041 48.057,25.018 48.395,24.68 49.983,24.68 X4.2
  Bottom Layer w0.4: X4.2 51.364,20.978 K3.COIL1 51.413,17.663 D12.2
BSPD_OK: D11.2 K4.COIL1 R22.2 X6.2 | length 13.5
  Top Layer w0.254: R22.2 59.845,25.937 59.845,25.273 60.342,24.776 61.656,24.776 X6.2
  Bottom Layer w0.254: X6.2 63.133,20.981 K4.COIL1 61.578,19.345 63.182,17.741 D11.2
CAN_GENCAN_N: R40.2 U8.6 X1.A8 | length 19.3
  Bottom Layer w0.3: X1.A8 21.485,45.659 21.485,40.831 22.796,39.519 R40.2 27.538,39.519 27.887,39.868 U8.6
CAN_GENCAN_P: R39.1 U8.7 X1.A7 | length 20.1
  Bottom Layer w0.3: X1.A7 22.277,47.867 22.277,42.392 23.148,41.521 R39.1 27.97,41.138 U8.7
CAN_MCCAN_N: R42.2 U7.6 X1.A6 | length 15.2
  Bottom Layer w0.3: X1.A6 22.725,50.419 R42.2 27.455,50.382 31.203,50.382 U7.6
CAN_MCCAN_P: R41.1 U7.7 X1.A5 | length 15.9
  Bottom Layer w0.3: X1.A5 24.092,52.052 R41.1 27.523,52.052 27.959,51.615 U7.7
GND: C1.1 C2.1 C3.1 C4.1 C5.1 C6.1 C7.1 C8.1 C9.1 C10.1 C11.1 C12.1 C13.1 C14.1 C15.1 C16.2 C17.2 D2.3 D3.3 D4.2 D5.2 D6.2 D11.1 D12.1 D13.1 D14.1 D15.1 K2.COIL2 K3.COIL2 K4.COIL2 LATCH_RELAY1.1 M1.2 M2.2 M3.2 M4.2 pad.2@72.39,78.74 Q2.3 R1.1 R2.1 R6.1 R7.1 R10.1 R11.1 R13.1 R14.1 R15.1 R19.1 R20.1 R21.1 R27.1 R28.1 R29.1 R30.1 R35.1 R36.1 R37.1 R38.1 U1.2 U2.2 U3.1 U4.8 U4.13 U5.10 U5.40 U6.8 U6.13 U7.2 U8.2 X1.A11 X1.A12 X1.A13 X1.A14 X1.A19 X1.A20 X1.A22 X1.A23 X1.A24 X1.A27 X1.A28 X5.3 X5.5 | length 4.9
  Top Layer w0.254: D2.3 cw(c30.084,62.465) 30.084,62.565 U1.2 ; D3.3 32.406,51.175 U2.2 ; X5.5 X5.3
  other v1: 37.375,41 45,41 58,42 41.425,44.9 38.5,48.125 23.3,51.475 20,54.5 34.5,60 37.5,61 21,62.5 52.925,64.775 47.925,74.175
  other v2: 40.875,51.675
IMD_OK: D13.2 K2.COIL1 R12.2 X3.2 | length 12
  Top Layer w0.4: R12.2 37.857,25.807 37.857,25.038 X3.2
  Bottom Layer w0.4: X3.2 39.596,20.974 K2.COIL1 39.645,17.667 D13.2
JTAG_RST: R17.1 U5.63 X5.10 | length 19.4
  Top Layer w0.3: R17.1 51.993,72.087 52.305,71.775 X5.10 56.51,71.775 57.98,73.244 v1(58.507,73.244) ; v1(59.689,75.409) 61.135,75.409 61.693,74.851 U5.63
  Bottom Layer w0.3: v1(58.507,73.244) 58.507,74.227 v1(59.689,75.409)
JTAG_TCLK: U5.62 X5.4 | length 11.6
  Top Layer w0.3: X5.4 56.093,75.585 56.562,76.054 v1(56.67,76.054) ; v1(58.892,78.036) 58.968,77.959 58.968,77.583 60.513,76.038 61.213,76.038 62.193,75.058 U5.62
  Bottom Layer w0.3: v1(56.67,76.054) 58.576,77.959 58.815,77.959 v1(58.892,78.036)
JTAG_TDI: U5.61 X5.8 | length 12.4
  Top Layer w0.3: X5.8 56.379,73.045 v1(56.798,73.464) ; v1(60.698,76.843) 61.516,76.843 61.518,76.841 62.693,75.666 U5.61
  Bottom Layer w0.3: v1(56.798,73.464) 56.798,73.507 60.057,76.766 60.622,76.766 v1(60.698,76.843)
JTAG_TDO: U5.58 X5.6 | length 13.7
  Top Layer w0.3: X5.6 56.45,74.315 v1(56.843,74.708) ; v1(60.242,77.835) 61.231,77.835 64.193,74.873 U5.58
  Bottom Layer w0.3: v1(56.843,74.708) 59.894,77.759 60.166,77.759 v1(60.242,77.835)
JTAG_TMS: R18.1 U5.64 X5.2 | length 10.2
  Top Layer w0.3: R18.1 53.611,78.447 53.611,77.085 53.841,76.855 56.997,76.855 59.821,74.031 U5.64
MCU_Relay: Q2.1 R10.2 X2.2 | length 12.1
  Top Layer w0.6: Q2.1 26.83,32.868 26.83,31.505 28.589,29.746 ; X2.2 27.827,28.934 28.614,29.721 29.382,30.489 R10.2
NetD1_1: D3.1 R9.2 U2.1 | length 5.7
  Top Layer w0.3: R9.2@28.7,52.288 30.243,52.288 D3.1 30.406,52.125 U2.1
NetD1_2: D3.2 R8.2 U2.3 | length 5.8
  Top Layer w0.3: R8.2 28.78,50.068 28.873,50.161 30.299,50.161 D3.2@30.375,50.236 ; D3.2 D3.2@30.375,50.236 ; U2.3 34.285,50.236 D3.2@30.375,50.236
NetD2_1: D2.1 R5.2 U1.1 | length 5.6
  Top Layer w0.3: R5.2 26.19,63.415 D2.1 28.045,63.477 31.568,63.477 U1.1
NetD2_2: D2.2 R3.2 U1.3 | length 5.8
  Top Layer w0.3: R3.2 26.139,61.515 D2.2 28.045,61.577 31.568,61.577 U1.3
"NetD3_LED 1_1": D7.1 R31.1 | length 2.2
  Top Layer w0.4: D7.1 68.156,32.991 R31.1
"NetD3_LED 1_2": D7.2 M1.3 | length 3.8
  Top Layer w0.4: M1.3 63.235,33.788 63.844,33.179 D7.2
"NetD3_LED 2_1": D8.1 R32.1 | length 2.2
  Top Layer w0.4: D8.1 68.163,40.964 R32.1
"NetD3_LED 2_2": D8.2 M2.3 | length 3.6
  Top Layer w0.4: M2.3 65.396,41.041 D8.2
"NetD3_LED 3_1": D9.1 R33.1 | length 2.1
  Top Layer w0.4: D9.1 68,47.851 R33.1
"NetD3_LED 3_2": D9.2 M3.3 | length 3.5
  Top Layer w0.4: M3.3 65.647,47.799 D9.2
"NetD3_LED 4_1": D10.1 R34.1 | length 2.2
  Top Layer w0.4: D10.1 68.071,54.112 R34.1
"NetD3_LED 4_2": D10.2 M4.3 | length 3.6
  Top Layer w0.4: M4.3 65.389,54.494 D10.2
NetD4_1: D6.1 R22.1 | length 2.2
  Top Layer w0.4: R22.1 60.989,27.324 61.571,27.906 D6.1
NetD6_1: D5.1 R16.1 | length 2.1
  Top Layer w0.4: R16.1 49.315,26.103 49.315,27.168 49.975,27.829 D5.1
NetD9_1: D4.1 R12.1 | length 2
  Top Layer w0.4: R12.1 39.157,26.257 39.157,26.977 39.761,27.582 D4.1
NetD10_2: D15.2 K1.COM LATCH_RELAY1.4 LATCH_RELAY1.8 R21.2 U4.14 X1.A33 | length 119.8
  Top Layer w0.3: 29.93,44.369 36.796,44.369 38.332,42.833 39.55,42.833 v1(39.71,42.673) ; v1(49.63,42.394) 49.63,43.687 50.742,44.799 U4.14
  Top Layer w0.4: X1.A33 7.959,47.009 7.959,45.143 11.25,41.851 22.56,41.851 25.078,44.369 29.93,44.369 ; U4.14 R21.2@54.895,44.799
  Top Layer w1: LATCH_RELAY1.8 12.717,24.961 v2(12.717,8.944)
  Bottom Layer w0.3: v1(39.71,42.673) 49.244,42.673 49.522,42.394 v1(49.63,42.394)
  Bottom Layer w1: D15.2 9.138,26.037 9.138,28.54 LATCH_RELAY1.8 8.847,28.831 8.847,42.742 7.806,43.784 7.806,47.428 9.475,49.097 X1.A33 ; v2(12.717,8.944) 13.211,8.451 13.211,6.967 LATCH_RELAY1.4 16.81,3.647 17.508,4.345 K1.COM
NetD11_1: D1.1 R4.1 | length 2.2
  Top Layer w0.4: R4.1 25.99,26.146 25.99,27.168 26.704,27.882 D1.1
NetD11_2: D1.2 K1.COIL2 Q2.2 | length 28.7
  Top Layer w0.6: v2(22.153,23.581) 22.153,27.181 22.954,27.982 D1.2 24.404,34.087 25.352,35.035 28.176,35.035 28.843,34.368 Q2.2
  Bottom Layer w0.6: v2(22.153,23.581) 24.177,21.557 28.289,21.557 K1.COIL2
NetK1_NO: K3.COM K4.NO | length 17.4
  Bottom Layer w1.27: K3.COM 52.161,6.775 57.877,6.775 61.448,10.345 K4.NO
NetK2_NO: K2.COM K3.NO | length 17.4
  Bottom Layer w1.27: K2.COM 37.978,4.345 40.203,6.57 45.486,6.57 49.261,10.345 K3.NO
NetK3_NO: K2.NO LATCH_RELAY1.3 R20.2 U4.11 X1.A32 | length 115.1
  Top Layer w0.4: v2(45.061,25.6) 45.061,29.264 50,34.203 50,39.959 51.03,40.989 U4.11 R20.2@55.208,40.989
  Top Layer w0.6: R20.2@55.208,40.989 R20.2
  Bottom Layer w0.6: K2.NO 45.061,14.29 v2(45.061,25.6)
  Bottom Layer w1: X1.A32 6.606,48.656 6.606,43.008 7.647,41.967 7.647,33.339 6.606,32.297 6.606,22.06 11.846,16.819 11.846,13.332 LATCH_RELAY1.3
  Bottom Layer w1.27: LATCH_RELAY1.3 16.728,8.45 19.226,8.45 20.193,7.483 34.227,7.483 37.089,10.345 K2.NO
NetK4_NO: K1.NO LATCH_RELAY1.5 | length 23.1
  Top Layer w1.27: LATCH_RELAY1.5 11.715,6.331 20.902,6.331 24.916,10.345 K1.NO
NetLATCH_RELAY1_2: LATCH_RELAY1.2 X1.A34 | length 35.1
  Bottom Layer w1: X1.A34 10.047,33.173 11.241,31.978 11.241,27.076 14.657,23.661 14.657,15.521 LATCH_RELAY1.2
NetLATCH_RELAY1_6: LATCH_RELAY1.6 R19.2 U4.9 X1.A31 | length 117.6
  Top Layer w0.4: X1.A31 7.036,52.086 7.036,44.919 11.24,40.715 22.799,40.715 25.66,43.576 36.491,43.576 43.178,36.889 v1(48.555,36.889) ; v1(50.837,36.889) 50.837,37.356 51.93,38.449 U4.9 R19.2@55.053,38.449
  Top Layer w0.6: R19.2@55.053,38.449 R19.2@55.071,38.467
  Bottom Layer w0.4: v1(48.555,36.889) v1(50.837,36.889)
  Bottom Layer w1: LATCH_RELAY1.6 5.192,12.486 5.192,35.006 6.379,36.194 6.379,41.537 4.562,43.355 4.562,49.612 X1.A31
"NetM1_LED 1_1": M1.1 R23.1 | length 2.2
  Top Layer w0.4: M1.1 63.189,35.87 65.133,35.87 R23.1
"NetM1_LED 2_1": M2.1 R24.1 | length 2.2
  Top Layer w0.4: M2.1 63.161,43.096 65.16,43.096 R24.1
"NetM1_LED 3_1": M3.1 R25.1 | length 2.1
  Top Layer w0.4: M3.1 63.15,49.842 65.171,49.842 R25.1
"NetM1_LED 4_1": M4.1 R26.1 | length 2.2
  Top Layer w0.4: M4.1 63.159,56.546 65.163,56.546 R26.1@65.215,56.598
NetQ1_1: Q1.1 R11.2 | length 2.8
  Top Layer w0.4: R11.2 31.092,73.795 31.392,74.095 Q1.1
NetR4_1: R6.2 R9.1 X1.A15 | length 12.4
  Top Layer w0.3: X1.A15 20.247,53.597 21.558,52.286 R6.2 27.398,52.286 R9.1@27.4,52.288
NetR5_1: R7.2 R8.1 X1.A16 | length 11.9
  Top Layer w0.3: X1.A16 15.597,50.547 25.27,50.547 R7.2 27.256,50.293 R8.1
NetR8_1: R2.2 R5.1 X1.A3 | length 7
  Top Layer w0.3: X1.A3 18.364,63.78 22.665,63.78 R2.2 24.713,63.505 R5.1
NetR9_1: R1.2 R3.1 X1.A4 | length 6.7
  Top Layer w0.3: X1.A4 18.171,61.221 22.794,61.221 R1.2 24.579,61.345 R3.1
"NetR13_LED 1_2": R23.2 R27.2 U5.34 | length 35.5
  Top Layer w0.3: R27.2 70.204,35.85 72.621,38.267 72.621,64.517 72.107,65.031 U5.34
  Top Layer w0.4: R23.2 66.566,35.901 68.368,35.901 R27.2
"NetR13_LED 2_2": R24.2 R28.2 U5.33 | length 26.8
  Top Layer w0.3: R28.2 69.946,43.15 72.066,45.27 72.066,64.128 71.662,64.531 U5.33
  Top Layer w0.4: R24.2 R28.2
"NetR13_LED 3_2": R25.2 R29.2 U5.32 | length 19.4
  Top Layer w0.3: R29.2 70.261,49.635 71.425,50.799 71.425,60.5 70.804,61.121 69.065,61.121 68.693,61.494 U5.32
  Top Layer w0.4: R25.2 66.641,49.761 68.452,49.761 R29.2
"NetR13_LED 4_2": R26.2 R30.2 U5.31 | length 11.2
  Top Layer w0.3: U5.31 68.193,61.286 68.965,60.514 69.822,60.514 70.558,59.777 70.558,57.119 69.959,56.52 R30.2
  Top Layer w0.4: R26.2@66.515,56.598 66.554,56.559 68.684,56.559 R30.2
NetR15_2: R35.2 U5.13 U6.3 | length 19.7
  Top Layer w0.3: v1(56.265,66.11) 56.341,66.034 56.94,66.034 56.943,66.031 U5.13
  Bottom Layer w0.3: U6.3 48.706,61.457 49.585,60.577 55.641,60.577 56.474,61.411 56.474,64.412 55.969,64.917 ; R35.2 54.646,65.697 55.426,64.917 55.969,64.917 ; v1(56.265,66.11) 56.265,65.579 55.969,65.283 55.969,64.917
NetR16_2: R36.2 U5.12 U6.5 | length 13.3
  Top Layer w0.3: v1(56.44,67.242) 57.15,66.531 U5.12
  Bottom Layer w0.3: R36.2 52.542,65.801 52.836,66.095 52.836,67.727 53.213,68.104 55.558,68.104 56.421,67.242 v1(56.44,67.242)
  Bottom Layer w0.4: U6.5 51.284,63.009 51.284,65.738 R36.2
NetR24_2: R15.2 U4.3 X1.A25 X3.1 | length 91.1
  Top Layer w0.3: 30.009,44.998 37.513,44.998 38.571,43.94 v1(38.571,43.904) ; v1(40.112,45.766) 40.22,45.766 40.299,45.844 43.715,45.844 43.89,45.668 43.89,44.827 R15.2@43.919,44.799
  Top Layer w0.4: X1.A25 12.547,45.897 15.508,42.936 21.754,42.936 23.815,44.998 30.009,44.998 ; R15.2@43.919,44.799 U4.3
  Top Layer w0.6: R15.2 R15.2@43.919,44.799
  Bottom Layer w0.3: v1(38.571,43.904) 40.036,45.369 40.036,45.689 v1(40.112,45.766)
  Bottom Layer w1: X1.A25 12.547,29.106 16.552,25.101 40.298,25.101 42.1,23.299 X3.1
NetR25_2: R13.2 U4.5 X1.A9 X6.1 | length 94.7
  Top Layer w0.4: X1.A9 18.104,46.154 19.747,46.154 20.063,46.469 38.348,46.469 41.312,43.505 43.522,43.505 43.636,43.391 43.636,42.516 R13.2 43.893,42.259 U4.5
  Bottom Layer w1: X1.A9 18.047,35.281 23.935,29.393 59.579,29.393 X6.1
NetR26_2: R14.2 U4.7 X1.A17 X4.1 | length 93.7
  Top Layer w0.4: X1.A17 15.547,45.436 17.085,43.898 20.328,43.898 22.095,45.665 37.871,45.665 41.023,42.512 41.023,41.679 41.926,40.777 42.946,40.777 43.38,40.342 43.38,40.227 43.855,39.752 R14.2 ; R14.2@43.873,39.719 U4.7
  Top Layer w0.6: R14.2 R14.2@43.873,39.719
  Bottom Layer w1: X1.A17 15.547,35.098 22.774,27.87 49.333,27.87 X4.1
NetU1_GENCAN_1: U5.5 U8.1 | length 61.4
  Top Layer w0.3: U5.5 61.779,70.031 63.24,71.493 v1(64.418,71.493) ; v1(64.849,59.416) 67.031,59.416 67.035,59.421 v1(67.039,59.416)
  Bottom Layer w0.3: U8.1 35.837,43.77 43.772,51.705 62.844,51.705 66.928,55.789 66.928,59.305 v1(67.039,59.416) ; v1(64.418,71.493) 64.849,71.061 v1(64.849,59.416)
NetU1_GENCAN_4: U5.6 U8.4 | length 66.6
  Top Layer w0.3: U5.6 62.642,69.531 63.503,70.393 v1(63.776,70.393) ; v1(64.073,60.376) v1(67.39,60.376)
  Bottom Layer w0.3: U8.4 37.566,38.598 38.352,39.383 38.352,42.905 37.676,43.581 37.676,44.586 44.066,50.976 63.324,50.976 67.959,55.611 67.959,59.807 v1(67.39,60.376) ; v1(63.776,70.393) 63.776,60.674 v1(64.073,60.376)
NetU1_MCCAN_1: U5.55 U7.1 | length 51.8
  Top Layer w0.3: v1(65.444,75.816) 65.444,75.707 65.693,75.458 U5.55
  Bottom Layer w0.3: U7.1 62.137,52.885 65.645,56.393 65.645,75.615 v1(65.444,75.816)
NetU1_MCCAN_4: U5.56 U7.4 | length 57.7
  Top Layer w0.3: v1(64.212,76.317) 64.289,76.24 64.289,75.954 65.193,75.05 U5.56
  Bottom Layer w0.3: U7.4 40.131,49.075 43.344,52.288 62.302,52.288 66.339,56.325 66.339,76.291 65.996,76.634 64.53,76.634 v1(64.212,76.317)
NetU2_4: U2.4 U5.20 | length 37.4
  Top Layer w0.3: U2.4 35.793,50.225 35.24,50.777 35.24,53.356 36.53,54.646 v1(44.858,54.646) ; v1(61.727,59.402) 61.804,59.479 62.271,59.479 62.693,59.9 U5.20
  Bottom Layer w0.3: v1(44.858,54.646) 55.26,54.646 60.016,59.402 v1(61.727,59.402)
NetU2_6: U2.6 U5.21 | length 33.7
  Top Layer w0.3: U2.6 36.996,53.229 37.811,54.044 43.681,54.044 v1(43.987,53.738) ; v1(62.861,58.298) 62.861,59.104 63.193,59.436 U5.21
  Bottom Layer w0.3: v1(43.987,53.738) 55.322,53.738 59.883,58.298 v1(62.861,58.298)
NetU3_4: U1.4 U5.3 | length 32.4
  Top Layer w0.3: U1.4 34.268,61.654 33.368,61.654 32.957,62.065 32.957,63.699 38.134,68.876 v1(45.263,68.876) ; v1(53.697,70.428) 55.419,70.428 56.023,71.031 U5.3
  Bottom Layer w0.3: v1(45.263,68.876) 47.173,68.876 48.725,70.428 v1(53.697,70.428)
NetU3_6: U1.6 U5.4 | length 28
  Top Layer w0.3: U1.6 34.557,63.515 39.167,68.125 44.264,68.125 v1(44.327,68.063) ; v1(54.578,69.438) 56.404,69.438 57.496,70.531 U5.4
  Bottom Layer w0.3: v1(44.327,68.063) 47.885,68.063 49.459,69.637 51.865,69.637 52.063,69.438 v1(54.578,69.438)
NetU4_2: U6.2 X2.1 | length 50.3
  Top Layer w0.3: X2.1 33.588,26.52 v1(33.588,32.305)
  Bottom Layer w0.3: v1(33.588,32.305) 33.457,32.305 33.281,32.481 33.281,40.172 33.865,40.756 33.865,53.412 40.747,60.294 46.329,60.294 47.436,61.401 U6.2
NetU4_4: U6.4 X1.A10 | length 41.6
  Bottom Layer w0.3: X1.A10 15.547,70.807 16.469,71.729 19.558,71.729 21.246,70.041 28.312,70.041 32.259,66.093 48.402,66.093 49.976,64.519 U6.4
NetU5_14: U4.2 U5.14 | length 27.2
  Top Layer w0.3: U4.2 48.096,46.069 49.026,46.999 49.026,58.709 51.459,61.142 53.205,61.142 57.594,65.531 U5.14
NetU5_15: U4.4 U5.15 | length 28.6
  Top Layer w0.3: U4.4 47.956,43.529 49.511,45.084 49.511,46.165 49.526,46.179 49.526,57.726 51.44,59.64 52.611,59.64 58.002,65.031 U5.15
NetU5_16: U4.6 U5.16 | length 30.3
  Top Layer w0.3: U4.6 46.963,41.047 48.001,41.047 48.543,41.588 48.543,43.307 50.073,44.837 50.073,57.18 51.693,58.801 52.479,58.801 58.209,64.531 U5.16
NetU5_17: U4.15 U5.17 | length 23.8
  Top Layer w0.3: U4.15 56.945,46.069 57.748,46.872 57.748,59.91 59.201,61.363 60.928,61.363 61.193,61.628 U5.17
NetU5_18: U4.12 U5.18 | length 27.8
  Top Layer w0.3: U4.12 57.047,42.259 58.32,43.532 58.32,59.688 59.494,60.863 61.135,60.863 61.693,61.421 U5.18
NetU5_19: U4.10 U5.19 | length 30.9
  Top Layer w0.3: U4.10 57.452,39.719 59.019,41.286 59.019,59.68 59.701,60.363 61.452,60.363 62.193,61.104 U5.19
RVPI: Q1.3 X1.A18 X1.A26 | length 22.7
  Top Layer w1.27: X1.A26 12.547,72.597 ; X1.A18 12.547,72.597 ; 13.191,73.241 12.547,72.597 ; Q1.3 16.335,76.385 12.547,72.597
SPLIT_GENCAN: C17.1 R39.2 R40.1 U8.5 | length 12.5
  Top Layer w0.3: v1(25.984,38.234) v1(25.984,42.45)
  Bottom Layer w0.3: v1(25.984,38.234) 25.998,38.219 R40.1 29.502,38.219 29.881,38.598 U8.5 30.387,36.738 C17.1 ; v1(25.984,42.45) 26.355,42.821 R39.2
SPLIT_MCCAN: C16.1 R41.2 R42.1 U7.5 | length 19.1
  Top Layer w0.3: v1(27.572,54.704) 28.143,54.704 28.669,54.178 v1(32.464,54.178)
  Bottom Layer w0.3: R42.1 27.44,49.097 31.218,49.097 U7.5 U7.5@31.426,49.075 ; R41.2 27.572,53.451 v1(27.572,54.704) ; C16.1 31.565,48.937 U7.5@31.426,49.075 ; v1(32.464,54.178) 32.833,53.809 32.833,49.493 32.415,49.075 U7.5@31.426,49.075
STBY_GENCAN: R38.2 U8.8 | length 2.2
  Bottom Layer w0.3: U8.8 30.457,42.478 30.457,44.463 R38.2
STBY_MCCAN: R37.2 U7.8 | length 2.5
  Bottom Layer w0.3: U7.8 31.247,52.891 31.247,55.412 R37.2
pads on no net: K1.NC K2.NC K3.NC K4.NC LATCH_RELAY1.7 Q2.4 U3.THM U5.1 U5.2 U5.11 U5.22 U5.23 U5.24 U5.25 U5.26 U5.27 U5.28 U5.29 U5.30 U5.35 U5.36 U5.37 U5.38 U5.39 U5.42 U5.43 U5.44 U5.45 U5.46 U5.47 U5.48 U5.49 U5.50 U5.51 U5.52 U5.53 U5.54 U5.57 U5.59 U5.60 U6.6 U6.7 U6.9 U6.10 U6.11 U6.12 U6.14 U6.15 X1.A21 X1.MH X5.7 X5.9

## Polygon pours and split planes (outlines as drawn)
GND on Top Layer "Top Layer-No Net 1" (solid, remove dead copper, pour order 6): 92.283,-28.625 92.283,92.356 -45.152,92.356 -45.152,-27.73
GND on Bottom Layer "Bottom Layer-No Net" (solid, remove dead copper, pour order 4): -42.375,114.775 -42.375,-16.75 110.125,-16.75 110.125,120.925 -42.15,120.925 -42.15,120.075

## Other copper
Bottom Layer:
  pour cut-out: 16.5,19.5 ccw(c16.5,20) 17,20 ccw(c16.5,20) 16.5,20.5 ccw(c16.5,20) 16,20 ccw(c16.5,20)
  pour cut-out: 18.5,18 ccw(c18.5,19) 19.5,19 ccw(c18.5,19) 18.5,20 ccw(c18.5,19) 17.5,19 ccw(c18.5,19)
  pour cut-out: 23,19.5 ccw(c23,20) 23.5,20 ccw(c23,20) 23,20.5 ccw(c23,20) 22.5,20 ccw(c23,20)
  pour cut-out: 21,18 ccw(c21,19) 22,19 ccw(c21,19) 21,20 ccw(c21,19) 20,19 ccw(c21,19)

## Silkscreen, mask and mechanical layers (free items; w line width, h text height)
Top Overlay:
  text "VEHICLE CONTROL UNIT" at 78.225,30.625 h2 r90
  text "REV 1.1 (01/2020)" at 63.4,28.625 h0.75
  text "Design and Layout by: / Harrison Power  / Vincent Pierce  / Kyle Jennings" at 76.725,6.95 h1 r90

## Text inside footprints (layer, text, board x,y; h text height)
D1: Top Overlay "*" at 23.875,27.55 h1.52 r180
D4: Top Overlay "*" at 36.925,27.175 h1.52 r180
D5: Top Overlay "*" at 47.301,27.421 h1.52 r180
D6: Top Overlay "*" at 58.897,27.498 h1.52 r180
D7: Top Overlay "*" at 65.294,32.671 h1.52 r180
D8: Top Overlay "*" at 65.294,40.261 h1.52 r180
D9: Top Overlay "*" at 65.294,47.312 h1.52 r180
D10: Top Overlay "*" at 65.294,53.707 h1.52 r180